# EAGLE board CT_schematic (EAGLE 7.6.0)

Size 100 x 80 mm. Coordinates in mm from the lower left corner, seen from the top.
Outline: 0,0 100,0 100,80 0,80 0,0
Copper layers (1*16): Top 0.035mm / dielectric 1.5mm / Bottom 0.035mm
Design rules "default": minimum track width 10mil, minimum drill 24mil, track to track 8mil, track to pad 8mil, pad to pad 8mil, via to via 8mil, smd to smd 8mil, copper to edge 40mil, drill to drill 8mil, minimum pad ring 10mil, minimum via ring 8mil, stop-mask expansion 4mil, vias tented up to drill 0mil, thermal gap 10mil

## Footprints (pad centres in the part's own frame; a part is rotated, then mirrored left to right if it is on the bottom)
C0603 = smd 0.8 x 0.8: 1 -0.762,0; 2 0.762,0
C0402 = smd 0.5 x 0.5: 1 -0.508,0; 2 0.508,0
C0805 = smd 1.2 x 1.3: 1 -1.016,0; 2 1.016,0
C1210 = smd 1.2 x 2.5: 1 -1.524,0; 2 1.524,0
EXV-9H = smd 3.505 x 1.676: 1 -2.857,0; 2 2.857,0
L0603 = smd 0.8 x 0.8: 1 -0.762,0; 2 0.762,0
PJ-037B_PACKAGE = drill 3.7 square: 1 12,0 | drill 3.2 square: 2 6,0
R0603 = smd 0.8 x 0.8: 1 -0.762,0; 2 0.762,0
LQFP144 = smd 0.35 x 1.35: 1 -8.75,-10.625; 2 -8.25,-10.625; 3 -7.75,-10.625; 4 -7.25,-10.625; 5 -6.75,-10.625; 6 -6.25,-10.625; 7 -5.75,-10.625; 8 -5.25,-10.625; 9 -4.75,-10.625; 10 -4.25,-10.625; 11 -3.75,-10.625; 12 -3.25,-10.625; 13 -2.75,-10.62; 14 -2.25,-10.625; 15 -1.75,-10.625; 16 -1.25,-10.625; 17 -0.75,-10.625; 18 -0.25,-10.625; 19 0.25,-10.625; 20 0.75,-10.625; 21 1.25,-10.625; 22 1.75,-10.625; 23 2.25,-10.625; 24 2.75,-10.62; 25 3.25,-10.625; 26 3.75,-10.625; 27 4.25,-10.625; 28 4.75,-10.625; 29 5.25,-10.625; 30 5.75,-10.625; 31 6.25,-10.625; 32 6.75,-10.625; 33 7.25,-10.625; 34 7.75,-10.625; 35 8.25,-10.625; 36 8.75,-10.625; 73 8.75,10.625; 74 8.25,10.625; 75 7.75,10.625; 76 7.25,10.625; 77 6.75,10.625; 78 6.25,10.625; 79 5.75,10.625; 80 5.25,10.625; 81 4.75,10.625; 82 4.25,10.625; 83 3.75,10.625; 84 3.25,10.625; 85 2.75,10.625; 86 2.25,10.625; 87 1.75,10.625; 88 1.25,10.625; 89 0.75,10.625; 90 0.25,10.625; 91 -0.25,10.625; 92 -0.75,10.625; 93 -1.25,10.625; 94 -1.75,10.625; 95 -2.25,10.625; 96 -2.75,10.625; 97 -3.25,10.625; 98 -3.75,10.625; 99 -4.25,10.625; 100 -4.75,10.625; 101 -5.25,10.625; 102 -5.75,10.625; 103 -6.25,10.625; 104 -6.75,10.625; 105 -7.25,10.625; 106 -7.75,10.625; 107 -8.25,10.625; 108 -8.75,10.625 | smd 1.35 x 0.35: 37 10.625,-8.75; 38 10.625,-8.25; 39 10.625,-7.75; 40 10.625,-7.25; 41 10.625,-6.75; 42 10.625,-6.25; 43 10.625,-5.75; 44 10.625,-5.25; 45 10.625,-4.75; 46 10.625,-4.25; 47 10.625,-3.75; 48 10.625,-3.25; 49 10.625,-2.75; 50 10.625,-2.25; 51 10.625,-1.75; 52 10.625,-1.25; 53 10.625,-0.75; 54 10.625,-0.25; 55 10.625,0.25; 56 10.625,0.75; 57 10.625,1.25; 58 10.625,1.75; 59 10.625,2.25; 60 10.625,2.75; 61 10.625,3.25; 62 10.625,3.75; 63 10.625,4.25; 64 10.625,4.75; 65 10.625,5.25; 66 10.625,5.75; 67 10.625,6.25; 68 10.625,6.75; 69 10.625,7.25; 70 10.625,7.75; 71 10.625,8.25; 72 10.625,8.75; 109 -10.625,8.75; 110 -10.625,8.25; 111 -10.625,7.75; 112 -10.625,7.25; 113 -10.625,6.75; 114 -10.625,6.25; 115 -10.625,5.75; 116 -10.625,5.25; 117 -10.625,4.75; 118 -10.625,4.25; 119 -10.625,3.75; 120 -10.625,3.25; 121 -10.625,2.75; 122 -10.625,2.25; 123 -10.625,1.75; 124 -10.625,1.25; 125 -10.625,0.75; 126 -10.625,0.25; 127 -10.625,-0.25; 128 -10.625,-0.75; 129 -10.625,-1.25; 130 -10.625,-1.75; 131 -10.625,-2.25; 132 -10.625,-2.75; 133 -10.625,-3.25; 134 -10.625,-3.75; 135 -10.625,-4.25; 136 -10.625,-4.75; 137 -10.625,-5.25; 138 -10.625,-5.75; 139 -10.625,-6.25; 140 -10.625,-6.75; 141 -10.625,-7.25; 142 -10.625,-7.75; 143 -10.625,-8.25; 144 -10.625,-8.75
QFN-16 = smd 0.813 x 0.305: 1 -1.448,0.75; 2 -1.448,0.25; 3 -1.448,-0.25; 4 -1.448,-0.75; 9 1.448,-0.75; 10 1.448,-0.25; 11 1.448,0.25; 12 1.448,0.75 | smd 0.305 x 0.813: 5 -0.75,-1.448; 6 -0.25,-1.448; 7 0.25,-1.448; 8 0.75,-1.448; 13 0.75,1.448; 14 0.25,1.448; 15 -0.25,1.448; 16 -0.75,1.448 | smd 1.803 x 1.803: 17 0,0
SOIC-8 = smd 1.6 x 0.6: 1 -2.7,1.905 | smd 1.55 x 0.6: 2 -2.7,0.635; 3 -2.7,-0.635; 4 -2.7,-1.905; 5 2.7,-1.905; 6 2.7,-0.635; 7 2.7,0.635; 8 2.7,1.905
182-009-MALE = drill 1.194 pad 1.524 octagon: 1 -5.537,10.923; 2 -2.769,10.923; 3 0,10.923; 4 2.769,10.923; 5 5.537,10.923; 6 -4.153,8.08; 7 -1.384,8.08; 8 1.384,8.08; 9 4.153,8.08 | hole 3.048: -12.446,9.501; 12.446,9.501
TH58NVG3S0HBAI4 = smd 0.46 x 0.46: A1 -5.6,2.4; A2 -5.6,1.6; A9 -5.6,-5.6; A10 -5.6,-6.4; B1 -4.8,2.4; B9 -4.8,-5.6; B10 -4.8,-6.4; C3 -4,0.8; C4 -3.2,0.8; C5 -2.4,0.8; C6 -1.6,0.8; C7 -0.8,0.8; C8 0,0.8; D3 -4,0; D4 -3.2,0; D5 -2.4,0; D6 -1.6,0; D7 -0.8,0; D8 0,0; E3 -4,-0.8; E4 -3.2,-0.8; E5 -2.4,-0.8; E6 -1.6,-0.8; E7 -0.8,-0.8; E8 0,-0.8; F3 -4,-1.6; F4 -3.2,-1.6; F5 -2.4,-1.6; F6 -1.6,-1.6; F7 -0.8,-1.6; F8 0,-1.6; G3 -4,-2.4; G4 -3.2,-2.4; G5 -2.4,-2.4; G6 -1.6,-2.4; G7 -0.8,-2.4; G8 0,-2.4; H3 -4,-3.2; H4 -3.2,-3.2; H5 -2.4,-3.2; H6 -1.6,-3.2; H7 -0.8,-3.2; H8 0,-3.2; J3 -4,-4; J4 -3.2,-4; J5 -2.4,-4; J6 -1.6,-4; J7 -0.8,-4; J8 0,-4; K3 -4,-4.8; K4 -3.2,-4.8; K5 -2.4,-4.8; K6 -1.6,-4.8; K7 -0.8,-4.8; K8 0,-4.8; L1 0.8,2.4; L2 0.8,1.6; L9 0.8,-5.6; L10 0.8,-6.4; M1 1.6,2.4; M2 1.6,1.6; M9 1.6,-5.6; M10 1.6,-6.4
ABS07-32.768KHZ-7-T = smd 1.1 x 2.4: 1 -2.5,0; 2 0,0
ABLS-25.000MHZ-B2F-T = smd 5.6 x 2.8: 1 -3.81,0; 2 5.69,0
WSON-8 = smd 0.3 x 0.6: 1 -0.75,0; 2 0.05,0; 3 0.85,0; 4 1.65,0; 5 1.65,3.8; 6 0.85,3.8; 7 0.05,3.8; 8 -0.75,3.8 | smd 3 x 2.6: PAD 0.45,1.9
SON-6 = smd 0.55 x 0.3: 1 -0.355,0.5 | smd 0.52 x 0.3: 2 -0.37,0; 3 -0.37,-0.5; 4 0.37,-0.5; 5 0.37,0; 6 0.37,0.5
SW_4-1437565-2 = smd 1.4 x 2.1: 1 -2.23,4.55; 2 -2.23,-4.55; 3 2.23,4.55; 4 2.23,-4.55
LGM67K-G1J2-24-Z = smd 0.8 x 1.4: A -2,0; C 0,0
NC7SZ125M5X = smd 1.3 x 0.7: 1 -1.3,0.95; 2 -1.3,0; 3 -1.3,-0.95; 4 1.3,-0.95; 5 1.3,0.95

## Placement (x,y rotation side)
C1  1e-06  [C0603]  -55.88,64.77 0 top  (outside the outline)
C2  1e-07  [C0603]  -59.69,64.77 0 top  (outside the outline)
C3  1e-07  [C0603]  -63.5,64.77 0 top  (outside the outline)
C4  1e-07  [C0603]  -67.31,64.77 0 top  (outside the outline)
C5  1e-07  [C0603]  -71.12,64.77 0 top  (outside the outline)
C6  1e-07  [C0603]  -74.93,64.77 0 top  (outside the outline)
C7  1e-07  [C0603]  -15.24,69.85 0 top  (outside the outline)
C8  1e-07  [C0603]  -19.05,69.85 0 top  (outside the outline)
C9  1e-07  [C0603]  -22.86,69.85 0 top  (outside the outline)
C10  1e-07  [C0603]  -26.67,69.85 0 top  (outside the outline)
C11  1e-07  [C0603]  -30.48,69.85 0 top  (outside the outline)
C12  1e-07  [C0603]  -34.29,69.85 0 top  (outside the outline)
C13  1e-07  [C0603]  -38.1,69.85 0 top  (outside the outline)
C14  4.7e-06  [C0603]  -44.45,64.77 0 top  (outside the outline)
C15  2.2e-06  [C0603]  -48.26,64.77 0 top  (outside the outline)
C16  2.2e-06  [C0603]  -52.07,64.77 0 top  (outside the outline)
C17  1e-08  [C0603]  -41.91,69.85 0 top  (outside the outline)
C18  1e-06  [C0603]  -45.72,69.85 0 top  (outside the outline)
C19  1e-11  [C0402]  -30.48,74.93 0 top  (outside the outline)
C20  1e-11  [C0402]  -34.29,74.93 0 top  (outside the outline)
C21  1e-11  [C0402]  -38.1,74.93 0 top  (outside the outline)
C22  1e-11  [C0402]  -41.91,74.93 0 top  (outside the outline)
C23  4.7e-06  [C0805]  -27.94,58.42 0 top  (outside the outline)
C24  1e-07  [C0402]  -45.72,74.93 0 top  (outside the outline)
C25  1e-07  [C0402]  -49.53,74.93 0 top  (outside the outline)
C26  1e-07  [C0402]  -53.34,74.93 0 top  (outside the outline)
C27  1e-05  [C0805]  -33.02,58.42 0 top  (outside the outline)
C28  1e-07  [C0402]  -57.15,74.93 0 top  (outside the outline)
C29  1e-07  [C0402]  -60.96,74.93 0 top  (outside the outline)
C30  1e-08  [C0402]  -64.77,74.93 0 top  (outside the outline)
C31  1e-05  [C1210]  -69.85,50.8 0 top  (outside the outline)
C32  1e-05  [C1210]  -16.51,58.42 0 top  (outside the outline)
C33  1e-07  [C0402]  -68.58,74.93 0 top  (outside the outline)
C34  0.0001  [EXV-9H]  -50.8,41.91 0 top  (outside the outline)
C35  0.0001  [EXV-9H]  -62.23,41.91 0 top  (outside the outline)
C36  1e-08  [C0402]  -72.39,74.93 0 top  (outside the outline)
F1  240.0  [L0603]  -49.53,69.85 0 top  (outside the outline)
J1  PJ-037B  [PJ-037B_PACKAGE]  -45.72,30.48 0 top  (outside the outline)
R2  1000.0  [R0603]  -53.34,69.85 0 top  (outside the outline)
R4  4700.0  [R0603]  -57.15,69.85 0 top  (outside the outline)
R5  2200.0  [R0603]  -60.96,69.85 0 top  (outside the outline)
R6  2200.0  [R0603]  -64.77,69.85 0 top  (outside the outline)
R7  10000.0  [R0603]  -58.42,58.42 0 top  (outside the outline)
R8  10000.0  [R0603]  -63.5,58.42 0 top  (outside the outline)
R9  10000.0  [R0603]  -68.58,58.42 0 top  (outside the outline)
R10  120.0  [R0603]  -68.58,69.85 0 top  (outside the outline)
R11  100000.0  [R0603]  -38.1,58.42 0 top  (outside the outline)
R12  10000.0  [R0603]  -73.66,58.42 0 top  (outside the outline)
R13  10000.0  [R0603]  -15.24,64.77 0 top  (outside the outline)
R14  10000.0  [R0603]  -20.32,64.77 0 top  (outside the outline)
R15  10000.0  [R0603]  -25.4,64.77 0 top  (outside the outline)
R16  10000.0  [R0603]  -30.48,64.77 0 top  (outside the outline)
R17  100000.0  [R0603]  -43.18,58.42 0 top  (outside the outline)
R18  2231.0  [R0603]  -72.39,69.85 0 top  (outside the outline)
R19  1000.0  [R0603]  -15.24,74.93 0 top  (outside the outline)
R20  10000.0  [R0603]  -35.56,64.77 0 top  (outside the outline)
R21  10000.0  [R0603]  -40.64,64.77 0 top  (outside the outline)
R22  9100.0  [R0603]  -19.05,74.93 0 top  (outside the outline)
R23  680000.0  [R0603]  -48.26,58.42 0 top  (outside the outline)
R24  120000.0  [R0603]  -53.34,58.42 0 top  (outside the outline)
U1  STM32F415ZGT6  [LQFP144]  -24.13,11.43 0 top  (outside the outline)
U2  MMA8451QT  [QFN-16]  -24.13,74.93 0 top  (outside the outline)
U3  SN65HVD230D  [SOIC-8]  -21.59,43.18 0 top  (outside the outline)
U4  182-009-113R531  [182-009-MALE]  -59.69,6.35 0 top  (outside the outline)
U5  TH58NVG3S0HBAI4  [TH58NVG3S0HBAI4]  -24.13,33.02 0 top  (outside the outline)
U6  ABS07-32.768KHZ-7-T  [ABS07-32.768KHZ-7-T]  -49.53,52.07 0 top  (outside the outline)
U7  ABLS-25.000MHZ-B2F-T  [ABLS-25.000MHZ-B2F-T]  -26.67,52.07 0 top  (outside the outline)
U8  LP3878SDX-ADJ/NOPB  [WSON-8]  -43.18,40.64 0 top  (outside the outline)
U9  TPS3895ADRYR  [SON-6]  -13.97,78.74 0 top  (outside the outline)
U10  4-1437565-2  [SW_4-1437565-2]  -62.23,29.21 0 top  (outside the outline)
U11  Q65110A2395  [LGM67K-G1J2-24-Z]  -58.42,50.8 0 top  (outside the outline)
U12  nc7sz125m5x  [NC7SZ125M5X]  -21.59,58.42 0 top  (outside the outline)

## Library data of the parts
C1-C36 F1 J1 R2 R4-R24 U1-U12 = circuit_tree

## Nets
CLK_CRYSTAL_U1_8: C19.1 U1.8 U6.1
CLK_CRYSTAL_U1_9: C20.1 U1.9 U6.2
CLK_CRYSTAL_U1_23: C21.1 U1.23 U7.1
CLK_CRYSTAL_U1_24: C22.1 U1.24 U7.2
GND: C1.2 C2.2 C3.2 C4.2 C5.2 C6.2 C7.2 C8.2 C9.2 C10.2 C11.2 C12.2 C13.2 C14.2 C15.2 C16.2 C17.2 C18.2 C19.2 C20.2 C21.2 C22.2 C23.2 C24.2 C25.2 C26.2 C27.2 C28.2 C29.2 C30.2 C31.2 C32.2 C33.2 C34.2 C35.2 C36.2 J1.2 R2.2 R8.2 R11.2 R19.2 R22.2 R24.2 U1.16 U1.31 U1.38 U1.51 U1.61 U1.83 U1.94 U1.107 U1.120 U1.130 U2.5 U2.10 U2.12 U2.17 U3.2 U4.5 U5.C5 U5.K3 U5.K8 U8.3 U8.PAD U9.2 U11.C U12.1 U12.3
NET_U1_25: R4.1 U1.25 U12.4
NET_U1_33: C17.1 C18.1 F1.1 U1.32 U1.33
NET_U1_71: C15.1 U1.71
NET_U1_106: C16.1 U1.106
NET_U1_136: R5.1 U1.136 U2.4
NET_U1_137: R6.1 U1.137 U2.6
NET_U1_138: R8.1 U1.138
NET_U1_141: U11.A
NET_U1_142: U10.3 U10.4
NET_U1_143: R7.1 U1.143
NET_U2_2: C25.1 U2.2
NET_U2_7: R9.1 U2.7
NET_U3_6: R10.2 U3.6
NET_U3_8: R11.1 U3.8
NET_U4_2: R10.2 U3.6 U4.2
NET_U4_3: R10.1 U3.7 U4.3
NET_U5_C3: R15.1 U5.C3
NET_U8_1: C30.1 U8.1
NET_U8_6: R18.2 R19.1 U8.6
NET_U8_8: R17.1 U8.8
NET_U9_1: R21.1 R22.1 U9.1
NET_U9_3: R23.2 R24.1 U9.3
NET_U9_4: R20.1 U9.4 U12.2
NET_U10_1: R2.1 U10.1 U10.2
PROC_CAN1_RX: U1.103 U3.4
PROC_CAN1_TX: U1.104 U3.1
PROC_FSMC_A16: U1.80 U5.D5
PROC_FSMC_A17: U1.81 U5.C4
PROC_FSMC_D0: U1.85 U5.H4
PROC_FSMC_D1: U1.86 U5.J4
PROC_FSMC_D2: U1.114 U5.K4
PROC_FSMC_D3: U1.115 U5.K5
PROC_FSMC_D4: U1.58 U5.K6
PROC_FSMC_D5: U1.59 U5.J7
PROC_FSMC_D6: U1.60 U5.K7
PROC_FSMC_D7: U1.63 U5.J8
PROC_FSMC_INT2: R16.1 U1.91 U5.C8
PROC_FSMC_NCE2: R12.1 U1.123 U5.C6
PROC_FSMC_NOE: R13.1 U1.118 U5.D4
PROC_FSMC_NWE: R14.1 U1.119 U5.C7
VCC_S1_11V4: C31.1 C34.1 C35.1 J1.1 R17.2 U8.4
VCC_TIER1_3V3: C1.1 C2.1 C3.1 C4.1 C5.1 C6.1 C7.1 C8.1 C9.1 C10.1 C11.1 C12.1 C13.1 C14.1 C23.1 C24.1 C26.1 C27.1 C28.1 C29.1 C32.1 C33.1 C36.1 F1.2 R4.2 R5.2 R6.2 R7.2 R9.2 R12.2 R13.2 R14.2 R15.2 R16.2 R18.1 R20.2 R21.2 R23.1 U1.6 U1.17 U1.30 U1.39 U1.52 U1.62 U1.72 U1.84 U1.95 U1.108 U1.121 U1.131 U1.144 U2.1 U2.14 U3.3 U5.H8 U5.J6 U8.5 U9.6 U12.5

## Tracks (layer width: path | path; a pad name or v marks a point on that pad's centre or on a via)
CLK_CRYSTAL_U1_8  (2 unrouted)
CLK_CRYSTAL_U1_9  (2 unrouted)
CLK_CRYSTAL_U1_23  (2 unrouted)
CLK_CRYSTAL_U1_24  (2 unrouted)
GND  (67 unrouted)
NET_U1_25  (2 unrouted)
NET_U1_33  (4 unrouted)
NET_U1_71  (1 unrouted)
NET_U1_106  (1 unrouted)
NET_U1_136  (2 unrouted)
NET_U1_137  (2 unrouted)
NET_U1_138  (1 unrouted)
NET_U1_142  (1 unrouted)
NET_U1_143  (1 unrouted)
NET_U2_2  (1 unrouted)
NET_U2_7  (1 unrouted)
NET_U3_6  (1 unrouted)
NET_U3_8  (1 unrouted)
NET_U4_2  (2 unrouted)
NET_U4_3  (2 unrouted)
NET_U5_C3  (1 unrouted)
NET_U8_1  (1 unrouted)
NET_U8_6  (2 unrouted)
NET_U8_8  (1 unrouted)
NET_U9_1  (2 unrouted)
NET_U9_3  (2 unrouted)
NET_U9_4  (2 unrouted)
NET_U10_1  (2 unrouted)
PROC_CAN1_RX  (1 unrouted)
PROC_CAN1_TX  (1 unrouted)
PROC_FSMC_A16  (1 unrouted)
PROC_FSMC_A17  (1 unrouted)
PROC_FSMC_D0  (1 unrouted)
PROC_FSMC_D1  (1 unrouted)
PROC_FSMC_D2  (1 unrouted)
PROC_FSMC_D3  (1 unrouted)
PROC_FSMC_D4  (1 unrouted)
PROC_FSMC_D5  (1 unrouted)
PROC_FSMC_D6  (1 unrouted)
PROC_FSMC_D7  (1 unrouted)
PROC_FSMC_INT2  (2 unrouted)
PROC_FSMC_NCE2  (2 unrouted)
PROC_FSMC_NOE  (2 unrouted)
PROC_FSMC_NWE  (2 unrouted)
VCC_S1_11V4  (5 unrouted)
VCC_TIER1_3V3  (58 unrouted)